# EAGLE board iRob_Upsized_ESP32DOIT_Shield v8 (EAGLE 9.7.0)
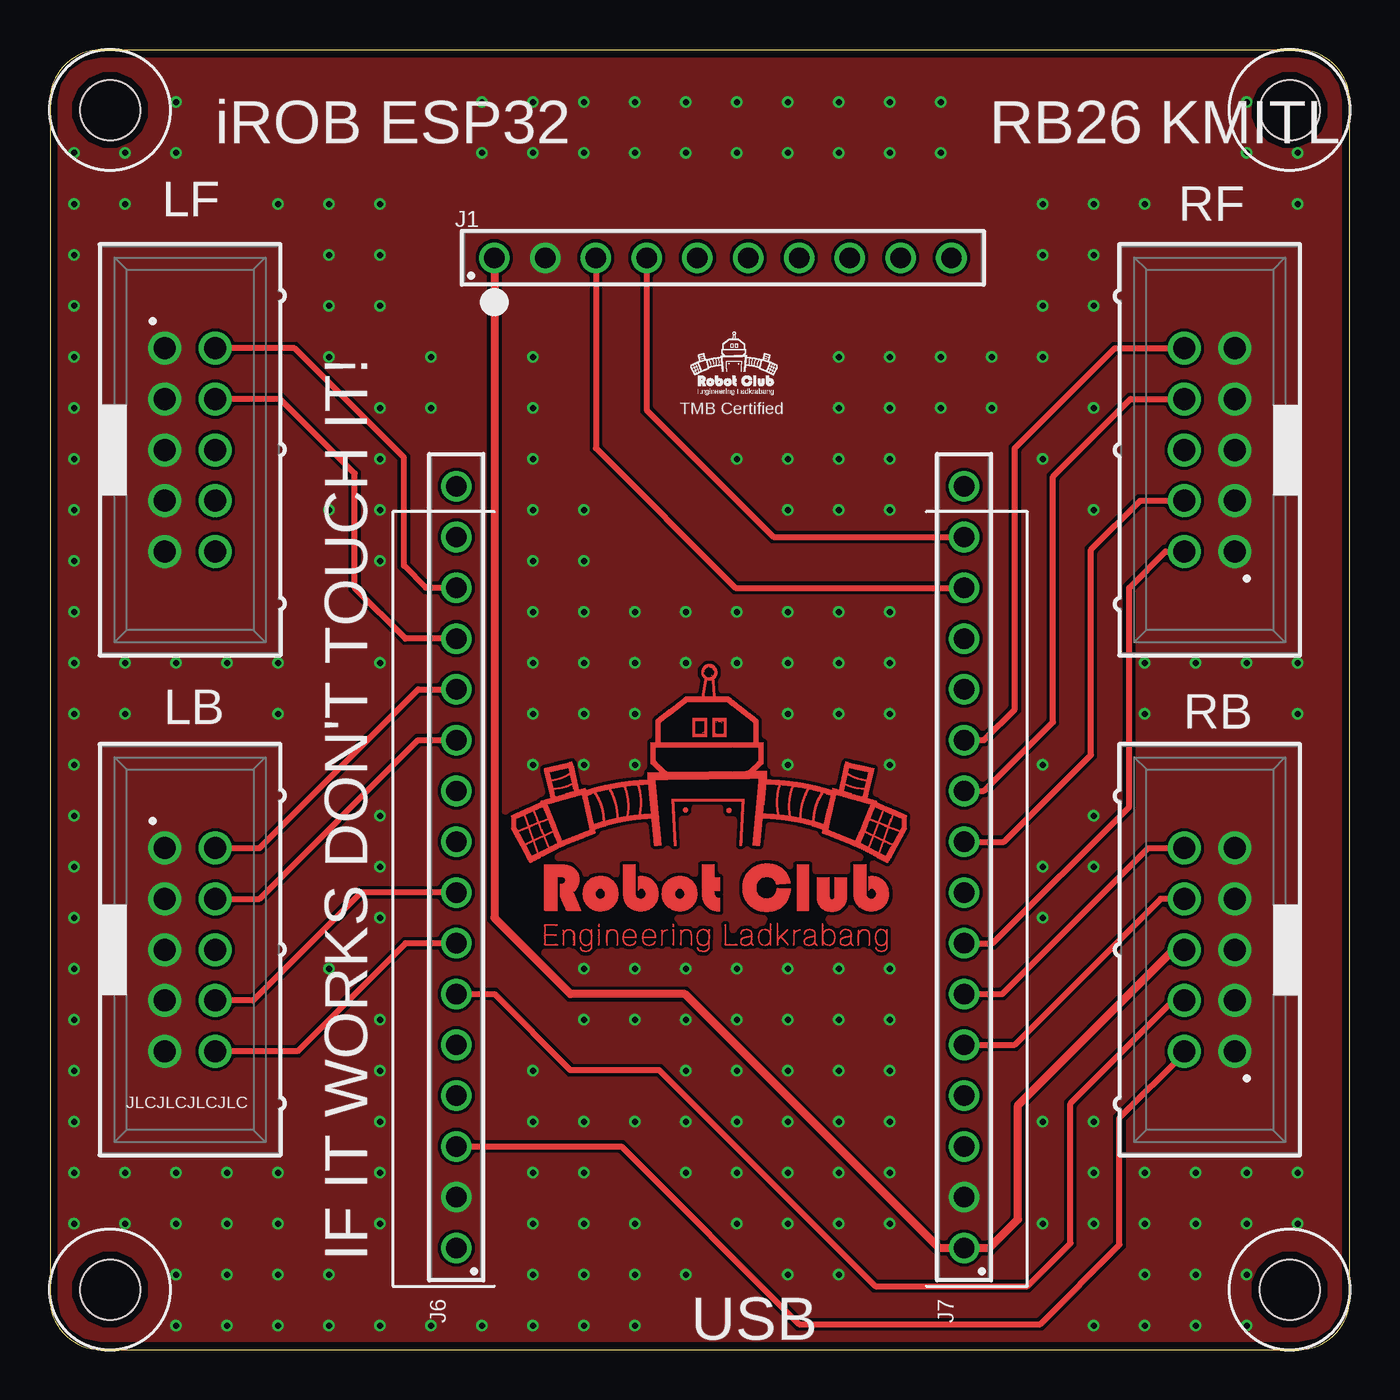
[diagram p0: board, top side]
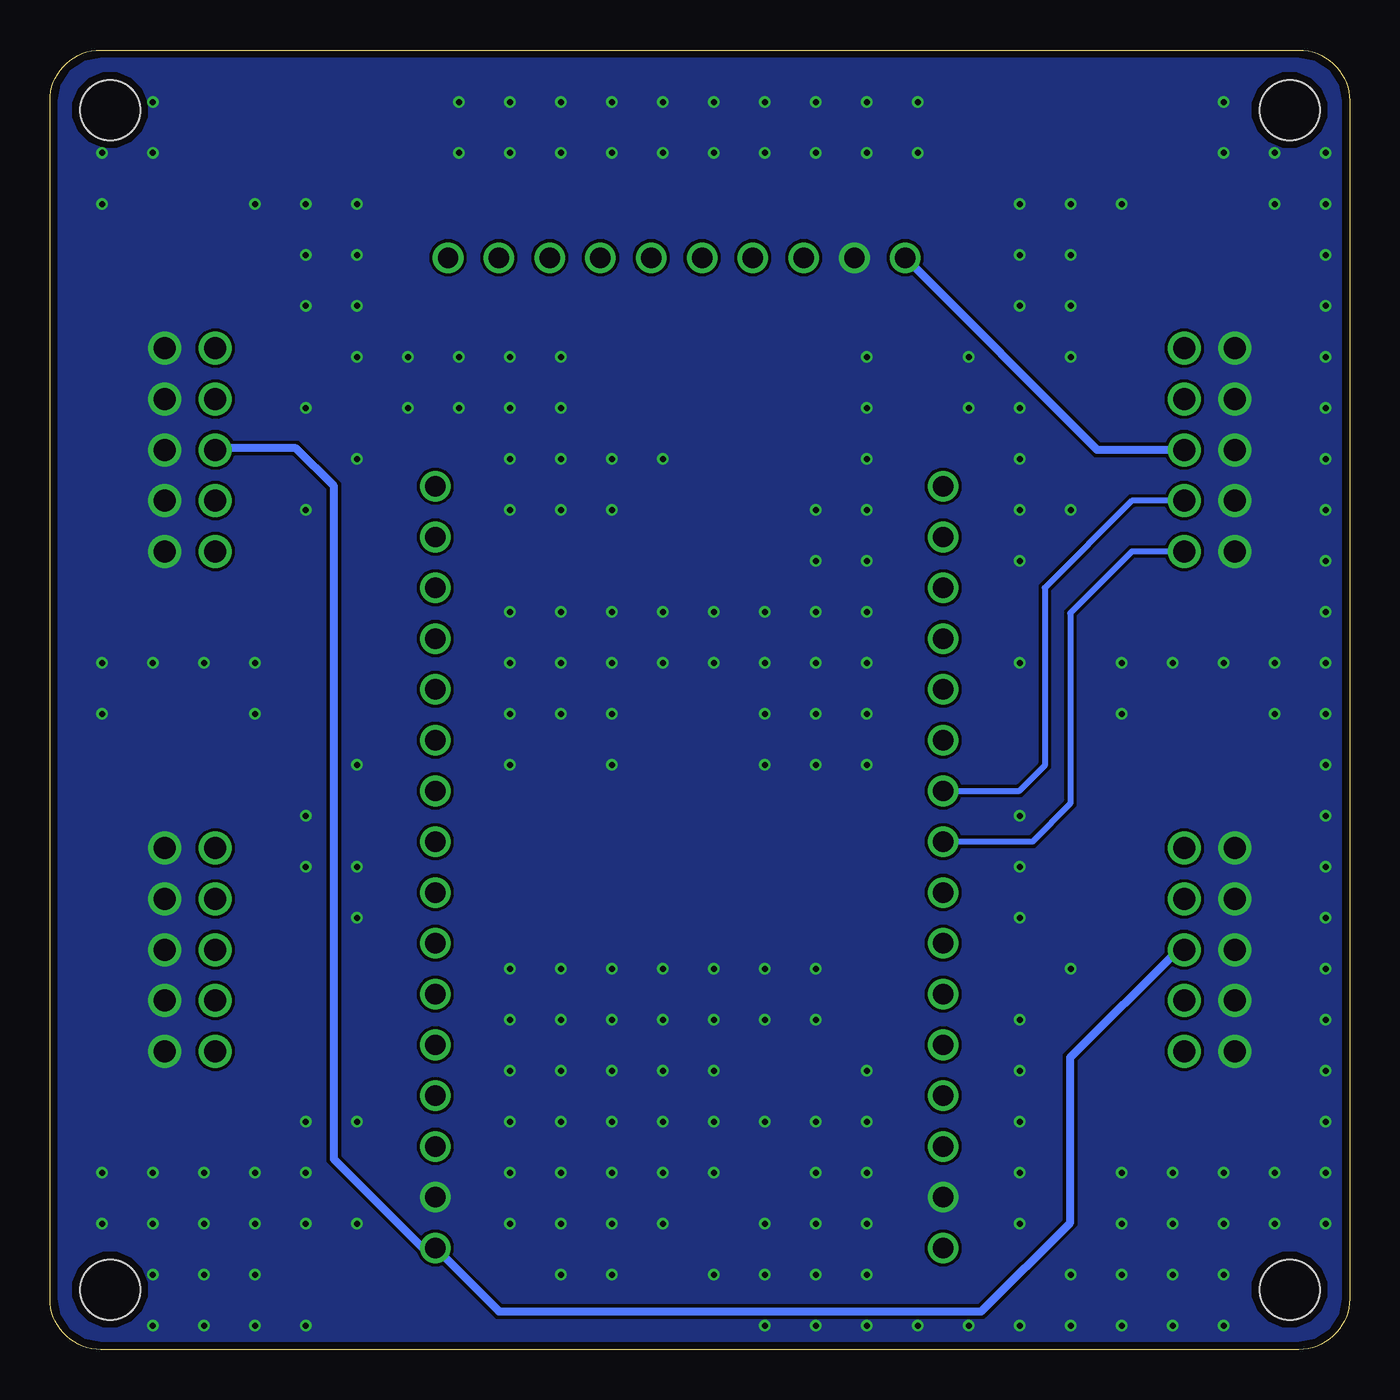
[diagram p1: board, bottom side, seen from below]

Size 65 x 65 mm. Coordinates in mm from the lower left corner, seen from the top.
Outline: 0,62.46 0,2.54 arc90 2.54,0 62.46,0 arc90 65,2.54 65,62.46 arc90 62.46,65 2.54,65 arc90 0,62.46
Copper layers (1*16): Top / Bottom
Stack-up Default Layer Stack: Top User Defined 0.035559375mm / Dielectric-1 User Defined 1.6mm / Bottom User Defined 0.035559375mm
Design rules: minimum copper width 6mil, minimum drill size 10mil, copper clearance wire_polygon to wire_polygon 6mil, copper clearance wire_polygon to pad_smd 6mil, copper clearance wire_polygon to via 6mil, copper clearance pad_smd to pad_smd 6mil, copper clearance pad_smd to via 6mil, copper clearance via to via 6mil, copper clearance smd to pad (same net) 6mil, copper clearance smd to via (same net) 6mil, copper clearance smd to smd (same net) 6mil, dimension clearance 15mil, restrict clearance 0mil, via restrict clearance 0mil, drill distance 6mil, keepout clearance 0mil
Holes 3 mm at 3,3 3,62 62,62 62,3
RestrictVias: area 23,21 to 43,25; area 3,10 to 12,30; area 3,35 to 12,55; area 26,44 to 30,53; area 28,38 to 35,43; area 36,39 to 45,40; area 44,3 to 47,46; area 19,3 to 22,45; area 54,11 to 63,30; area 54,36 to 63,55; area 19,51 to 48,58; area 31,46 to 38,51; 8 more areas

## Footprints (pad centres in the part's own frame; a part is rotated, then mirrored left to right if it is on the bottom)
61301011821 = drill 1.02: 1 -11.43,0; 2 -8.89,0; 3 -6.35,0; 4 -3.81,0; 5 -1.27,0; 6 1.27,0; 7 3.81,0; 8 6.35,0; 9 8.89,0; 10 11.43,0
61301611821 = drill 1.02: 1 -19.05,0; 2 -16.51,0; 3 -13.97,0; 4 -11.43,0; 5 -8.89,0; 6 -6.35,0; 7 -3.81,0; 8 -1.27,0; 9 1.27,0; 10 3.81,0; 11 6.35,0; 12 8.89,0; 13 11.43,0; 14 13.97,0; 15 16.51,0; 16 19.05,0
61201021621 = drill 1.1: 1 -5.08,-1.27; 2 -5.08,1.27; 3 -2.54,-1.27; 4 -2.54,1.27; 5 0,-1.27; 6 0,1.27; 7 2.54,-1.27; 8 2.54,1.27; 9 5.08,-1.27; 10 5.08,1.27

## Placement (x,y rotation side)
J1  61301011821  [61301011821]  33.66,54.61 0 top
J6  61301611821  [61301611821]  20.32,24.13 90 top
J7  61301611821  [61301611821]  45.72,24.13 90 top
LB  61201021621  [61201021621]  7,20 270 top
LF  61201021621  [61201021621]  7,45 270 top
RB  61201021621  [61201021621]  58,20 90 top
RF  61201021621  [61201021621]  58,45 90 top

## Library data of the parts
J1 = Wurth_Connectors_WR-PHD; DATASHEET-URL: https://www.we-online.com/catalog/datasheet/61301011821.pdf; GENDER: Socket Header; IR: 3A; MOUNT: THT; PACKAGING: Tray; PART-NUMBER: 61301011821; PINS: 10; PITCH: 2.54mm; ROWS: Single; TYPE: Straight
J6 J7 = Wurth_Connectors_WR-PHD; DATASHEET-URL: https://www.we-online.com/catalog/datasheet/61301611821.pdf; GENDER: Socket Header; IR: 3A; MOUNT: THT; PACKAGING: Tray; PART-NUMBER: 61301611821; PINS: 16; PITCH: 2.54mm; ROWS: Single; TYPE: Straight
LB LF RB RF = Wurth_Connectors_WR-BHD; CONTACT-RESISTANCE: 20mOhm; DATASHEET-URL: https://www.we-online.com/catalog/datasheet/61201021621.pdf; GENDER: Male; IR: 3A; LENGTH: 20.36mm; MOUNT: THT; PACKAGING: Tray; PART-NUMBER: 61201021621; PINS: 10; PITCH: 2.54mm; TYPE: Straight; WORKING-VOLTAGE: 250V(AC)

## Nets
2: J7.4
3V3: J1.1 J7.1 LB.6 LF.6 RB.6 RF.6
5: J7.8
12: J6.4
14: J6.5
15: J7.3
ENC_LB_A: J6.11 LB.4
ENC_LB_B: J6.12 LB.2
ENC_LF_A: J6.13 LF.4
ENC_LF_B: J6.14 LF.2
ENC_RB_A: J6.6 RB.4
ENC_RB_B: J6.3 RB.2
ENC_RF_A: J7.9 RF.4
ENC_RF_B: J7.7 RF.2
GND: J1.2 J6.2 J7.2 LB.1 LB.3 LB.5 LB.7 LB.9 LF.1 LF.3 LF.5 LF.7 LF.9 RB.1 RB.3 RB.5 RB.7 RB.9 RF.1 RF.3 RF.5 RF.7 RF.9
I2C_SCL: J1.3 J7.14
I2C_SDA: J1.4 J7.15
M_LB_IN1: J6.8 LB.8
M_LB_IN2: J6.7 LB.10
M_LF_IN1: J6.10 LF.8
M_LF_IN2: J6.9 LF.10
M_RB_IN1: J7.5 RB.8
M_RB_IN2: J7.6 RB.10
M_RF_IN1: J7.10 RF.8
M_RF_IN2: J7.11 RF.10
RST: J6.15
VIN: J6.1

## Tracks (layer width: path | path; a pad name or v marks a point on that pad's centre or on a via)
3V3
  Top 0.406: J1.1 22.23,21.59 26.04,17.78 31.75,17.78 44.45,5.08 J7.1 46.99,5.08 48.42,6.51 48.42,12.22 56.2,20 RB.6
  Bottom 0.406: LF.6 12.62,45 J1.1 | LB.6 8.57,20 13.97,14.61 13.97,6.35 18.41,1.91 42.55,1.91 J7.1 46.35,5.08 50.8,9.53 50.8,43.18 52.7,45.09 56.65,45.09 RF.6
ENC_LB_A
  Top 0.305: LB.4 10.47,22.54 18.41,30.48 J6.11
ENC_LB_B
  Top 0.305: LB.2 10.47,25.08 18.41,33.02 J6.12
ENC_LF_A
  Top 0.305: J6.13 17.78,35.56 15.24,38.1 15.24,43.81 11.52,47.54 LF.4
ENC_LF_B
  Top 0.305: J6.14 18.81,38.1 17.7,39.21 17.7,44.61 12.23,50.08 LF.2
ENC_RB_A
  Top 0.305: J6.6 22.23,17.78 26.04,13.97 30.48,13.97 41.27,3.17 48.9,3.17 51.04,5.32 51.04,12.3 56.2,17.46 RB.4
ENC_RB_B
  Top 0.305: J6.3 28.57,10.16 37.47,1.27 49.53,1.27 53.5,5.24 53.5,11.59 56.73,14.82 RB.2
ENC_RF_A
  Top 0.305: J7.9 47.72,25.4 52.07,29.75 52.07,40.01 54.52,42.46 RF.4
ENC_RF_B
  Top 0.305: J7.7 47.15,20.32 53.98,27.15 53.98,38.1 55.8,39.92 RF.2
GND  (via drill 0.3)
  other vias: 44.55,62.4 24.15,62.4 29.25,59.85 54.75,57.3 13.95,57.3 34.35,6.3 59.85,3.75 39.45,3.75 24.15,1.2 54.75,6.3 8.85,8.85 24.15,11.4 39.45,13.95 34.35,16.5 29.25,19.05 29.25,29.25 49.65,29.25 3.75,31.8 24.15,31.8 39.45,34.35 59.85,34.35 34.35,36.9 24.15,42 39.45,44.55 49.65,49.65 34.35,62.4 59.85,59.85 39.45,59.85 3.75,57.3 49.65,54.75 24.15,6.3 3.75,6.3 29.25,3.75 8.85,3.75 54.75,1.2 13.95,1.2 39.45,8.85 59.85,8.85 34.35,11.4 39.45,19.05 49.65,24.15 54.75,31.8 8.85,34.35 29.25,34.35 24.15,36.9 13.95,42 49.65,44.55 24.15,47.1 44.55,47.1 19.05,49.65 39.45,49.65 13.95,52.2 42,62.4 21.6,62.4 36.9,59.85 52.2,57.3 11.4,57.3 11.4,6.3 26.7,3.75 6.3,3.75 21.6,1.2 52.2,6.3 16.5,8.85 36.9,8.85 57.3,8.85 1.2,11.4 42,11.4 31.8,16.5 36.9,19.05 1.2,21.6 52.2,26.7 36.9,29.25 1.2,31.8 42,31.8 62.4,31.8 6.3,34.35 26.7,34.35 31.8,36.9 16.5,39.45 1.2,42 42,42 52.2,47.1 1.2,52.2 31.8,62.4 26.7,59.85 6.3,59.85 62.4,57.3 1.2,57.3 16.5,54.75 52.2,52.2 1.2,6.3 57.3,3.75 36.9,3.75 52.2,1.2 11.4,1.2 42,6.3 62.4,6.3 6.3,8.85 26.7,8.85 31.8,11.4 52.2,11.4 16.5,13.95 36.9,13.95 1.2,16.5 42,16.5 26.7,19.05 16.5,24.15 1.2,26.7 26.7,29.25 11.4,31.8 16.5,34.35 36.9,34.35 57.3,34.35 1.2,36.9 42,36.9 26.7,39.45 52.2,42 16.5,44.55 36.9,44.55 1.2,47.1 42,47.1 47.1,49.65 29.25,62.4 44.55,59.85 24.15,59.85 3.75,59.85 13.95,54.75 49.65,52.2 54.75,3.75 13.95,3.75 29.25,1.2 8.85,1.2 39.45,6.3 59.85,6.3 3.75,8.85 24.15,8.85 29.25,11.4 49.65,11.4 34.35,13.95 39.45,16.5 49.65,21.6 24.15,29.25 29.25,31.8 34.35,34.35 54.75,34.35 39.45,36.9 24.15,39.45 34.35,44.55 19.05,47.1 39.45,47.1 24.15,49.65 44.55,49.65 59.85,62.4 39.45,62.4 34.35,59.85 49.65,57.3 29.25,6.3 8.85,6.3 24.15,3.75 59.85,1.2 19.05,1.2 49.65,6.3 34.35,8.85 54.75,8.85 39.45,11.4 24.15,13.95 29.25,16.5 13.95,19.05 34.35,19.05 39.45,31.8 3.75,34.35 24.15,34.35 29.25,36.9 39.45,42 24.15,44.55 13.95,49.65 26.7,62.4 6.3,62.4 31.8,59.85 16.5,57.3 1.2,54.75 16.5,6.3 26.7,1.2 6.3,1.2 36.9,6.3 57.3,6.3 11.4,8.85 31.8,8.85 52.2,8.85 26.7,11.4 1.2,13.95 42,13.95 16.5,16.5 36.9,16.5 31.8,19.05 1.2,24.15 16.5,26.7 26.7,31.8 1.2,34.35 42,34.35 62.4,34.35 36.9,36.9 26.7,42 1.2,44.55 42,44.55 16.5,47.1 36.9,62.4 62.4,59.85 42,59.85 21.6,59.85 1.2,59.85 52.2,54.75 26.7,6.3 6.3,6.3 31.8,3.75 11.4,3.75 57.3,1.2 16.5,1.2 1.2,8.85 42,8.85 62.4,8.85 16.5,11.4 36.9,11.4 31.8,13.95 26.7,16.5 1.2,19.05 42,19.05 16.5,21.6 52.2,24.15 1.2,29.25 42,29.25 36.9,31.8 11.4,34.35 31.8,34.35 26.7,36.9 1.2,39.45 16.5,42 36.9,42 47.1,47.1 1.2,49.65 42,49.65 16.5,52.2
  pour Bottom (rank 6, no thermals): 0,65.41 65.41,65.41 65.41,0 0,0
  pour Top (rank 6, no thermals): 0,65.41 65.41,65.41 65.41,0 0,0
I2C_SCL
  Top 0.305: J1.3 27.3,45.09 34.29,38.1 J7.14
I2C_SDA
  Top 0.305: J1.4 29.84,46.99 36.2,40.64 J7.15
M_LB_IN1
  Top 0.305: J6.8 15.56,22.86 10.16,17.46 LB.8
M_LB_IN2
  Top 0.305: J6.7 17.78,20.32 12.38,14.92 LB.10
M_LF_IN1
  Bottom 0.305: LF.8 10.88,42.46 15.24,38.1 15.24,29.21 16.51,27.94 J6.10
M_LF_IN2
  Bottom 0.305: LF.10 10.88,39.92 13.97,36.83 13.97,27.3 15.88,25.4 J6.9
M_RB_IN1
  Top 0.305: RB.8 55.56,22.54 48.26,15.24 J7.5
M_RB_IN2
  Top 0.305: J7.6 47.62,17.78 54.92,25.08 RB.10
M_RF_IN1
  Top 0.305: J7.10 46.72,27.94 50.16,31.39 50.16,43.66 54.05,47.54 RF.8
M_RF_IN2
  Top 0.305: J7.11 46.72,30.48 48.26,32.02 48.26,45.09 53.26,50.08 RF.10
(copper drawn outside any net)
  shapes: Top area x13730

## Text on the board
SilkscreenTop: iROB ESP32 | RB26 KMITL | TMB Certified | JLCJLCJLCJLC | IF IT WORKS DON'T TOUCH IT! | USB
SolderMaskTop: rev1.0